# EAGLE board Gadget-Box-NodeMCU (EAGLE 6.6.0)
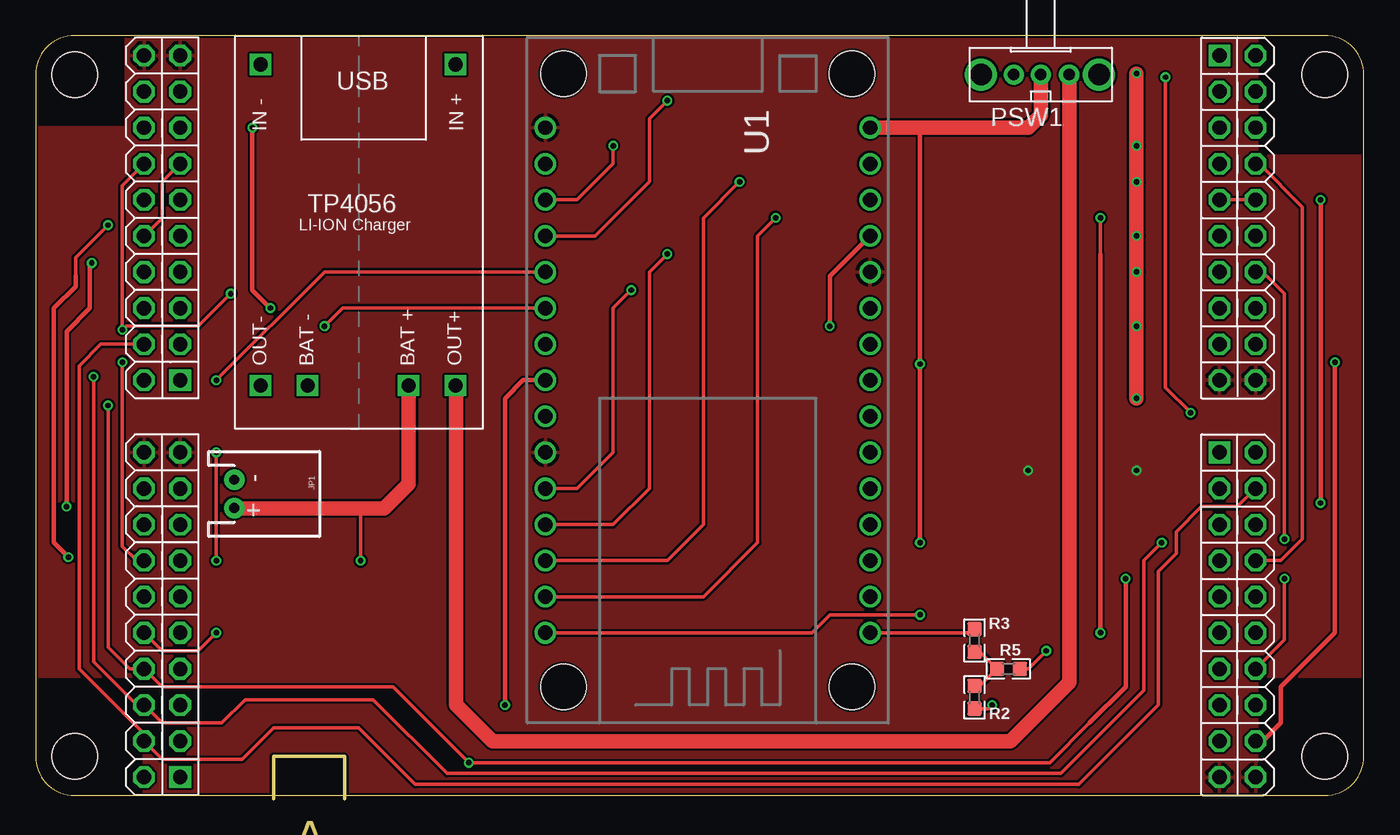
[diagram p0: board, top side]
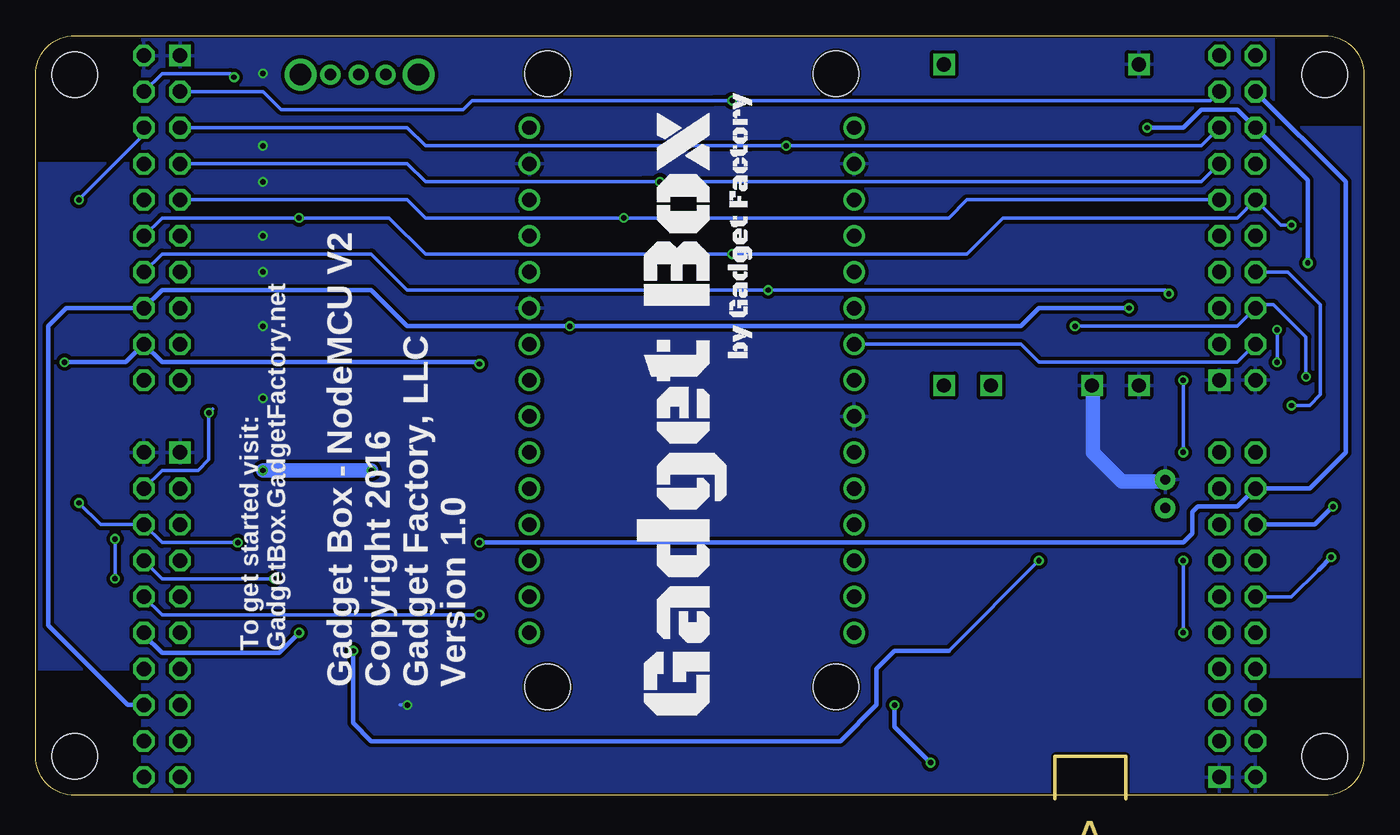
[diagram p1: board, bottom side, seen from below]

Size 93.5 x 53.75 mm. Coordinates in mm from the lower left corner, seen from the top.
Outline: 16.75,0 16.75,3 21.75,3 21.75,0
Copper layers (1*16): Top 0.035mm / dielectric 1.5mm / Bottom 0.035mm
Design rules "hackvana *": minimum track width 6mil, minimum drill 0.3mm, track to track 6mil, track to pad 6mil, pad to pad 6mil, via to via 6mil, smd to smd 0mil, copper to edge 6mil, drill to drill 6mil, minimum pad ring 10mil, minimum via ring 6mil, stop-mask expansion 2mil, vias tented up to drill 100mil, thermal gap 10mil
Net classes: 2 gnd: width 0.254 mm, drill 0.381 mm, clearance 0.254 mm; 3 usbvcc: width 0.254 mm, drill 0.381 mm, clearance 0.254 mm; 4 aref: width 0.254 mm, drill 0.381 mm, clearance 0.254 mm

## Footprints (pad centres in the part's own frame; a part is rotated, then mirrored left to right if it is on the bottom)
ECOG93P53P5 = hole 3.2: 4,4; 92,4; 92,52; 4,52
ECOG = drill 1.016 octagon: 3V3@B8 21.59,3.81; 3V3@G8 21.59,1.27; 5V@B7 19.05,3.81; G0 1.27,1.27; G1 3.81,1.27; G2 6.35,1.27; G3 8.89,1.27; G4 11.43,1.27; G5 13.97,1.27; G6 16.51,1.27; G7 19.05,1.27; GND@B -1.27,3.81; I2C-SCL@B5 13.97,3.81; I2C-SDA@B4 11.43,3.81; RESET@B6 16.51,3.81; SPI-CS@B3 8.89,3.81; SPI-MISO@B0 1.27,3.81; SPI-MOSI@B1 3.81,3.81; SPI-SCK@B2 6.35,3.81 | drill 1.016 square: GND@G -1.27,1.27
JST-2-PTH-NS = drill 0.7 pad 1.448: 1 -1,0; 2 1,0
OS102011MA1Q = drill 0.8 pad 1.422: 1 -2,0; 2 0,0; 3 1.9,0 | drill 1.5 pad 2.184: MT1 -4.1,0; MT2 4.2,0
0603 = smd 1 x 1: 1 -0.8,0; 2 0.8,0
ESP12E_DEVKIT = drill 1.016: 3V3@0 -11.43,-7.62; 3V3@1 11.43,5.08; 3V3@2 11.43,-17.78; AD0 -11.43,17.78; CLK -11.43,-2.54; CMD -11.43,2.54; D0 11.43,17.78; D1 11.43,15.24; D2 11.43,12.7; D3 11.43,10.16; D4 11.43,7.62; D5 11.43,0; D6 11.43,-2.54; D7 11.43,-5.08; D8 11.43,-7.62; EN -11.43,-10.16; GND@0 -11.43,-5.08; GND@1 -11.43,-15.24; GND@2 11.43,2.54; GND@3 11.43,-15.24; RST -11.43,-12.7; RSV@0 -11.43,15.24; RSV@1 -11.43,12.7; RX 11.43,-10.16; SD0 -11.43,0; SD1 -11.43,5.08; SD2 -11.43,7.62; SD3 -11.43,10.16; TX 11.43,-12.7; VIN -11.43,-17.78 | hole 3.2: -10.16,21.59; 10.16,21.59; 10.16,-21.59; -10.16,-21.59
TP4056 = drill 1 pad 1.422 square: BAT+ 3.505,-8.89; BAT- -3.607,-8.89; IN+ 6.807,13.716; IN- -6.909,13.716; OUT+ 6.807,-8.89; OUT- -6.909,-8.89

## Placement (x,y rotation side)
$$U$1  [ECOG93P53P5]  -1.25,-1 0 top
AH  ECOGECOG_SLOT  [ECOG]  82.06,23.13 270 top
AL  ECOGECOG_SLOT  [ECOG]  82.06,51.07 270 top
BH  ECOGECOG_SLOT  [ECOG]  11.45,30.75 90 top
BL  ECOGECOG_SLOT  [ECOG]  11.45,2.81 90 top
JP1  [JST-2-PTH-NS]  13.99,21.48 270 top
PSW1  OS102011MA1Q  [OS102011MA1Q]  70.75,51 180 top
R2  100k  [0603]  66.09,7.16 90 top
R3  DNP  [0603]  66.09,11.16 270 top
R5  100k  [0603]  68.47,9.16 0 top
U1  ESP12E_DEVKIT  [ESP12E_DEVKIT]  47.31,29.48 180 top
U$1  TP4056  [TP4056]  22.75,38 0 top
U$100  [GADGETBOX_TEXT]  47.79,27.18 90 bottom

## Library data of the parts
$$U$1 = eCogs
AH AL BH BL = eCogs; PARTNO: PPPC102LFBN-RC,SULLINS CONNECTOR SOLUTIONS,dk,S6106-ND,"CONN HEADER FEM 20POS.1"" DL GOLD", REF67
JP1 = SparkFun; PARTNO: B2B-PH-SM4-TB(LF)(SN),JST SALES AMERICA INC (VA),dk,455-1734-1-ND ,"2 Positions Header, Shrouded Connector 0.079 (2.00mm) Through Hole Tin ", REF87
PSW1 = adafruit; PARTNO: OS102011MA1QN1,C&K Components,dk,CKN9559-ND,SWITCH SLIDE SPDT 100MA 12V , REF72
R2 R5 = GadgetFactory; PARTNO: RC0603JR-07100KL,YAGEO (VA),dk,311-100KGRCT-ND,RES SMD 100K OHM 5% 1/10W 0603 , REF76
R3 = GadgetFactory; BOM: EXCLUDE
U1 = ESP12E_DEVKIT
U$1 = TP4056 charging module
U$100 = GadgetFactory

## Nets
3V3: AH.3V3@B8 AH.3V3@G8 AL.3V3@B8 AL.3V3@G8 BH.3V3@B8 BH.3V3@G8 BL.3V3@B8 BL.3V3@G8 U1.3V3@0 U1.3V3@1 U1.3V3@2
ADC: R3.1 U1.AD0
D0/RX/MISO: AL.G0 BH.G7 U1.RX
D1/TX/MOSI: AL.G1 BH.G6 U1.TX
D2: AL.G2 BH.G5 BH.SPI-CS@B3 U1.D2
D3: AL.G3 AL.SPI-CS@B3 BH.G4 U1.D1
GND [gnd]: AH.GND@B AH.GND@G AL.GND@B AL.GND@G BH.GND@B BH.GND@G BL.GND@B BL.GND@G JP1.1 R2.1 U1.GND@0 U1.GND@1 U1.GND@2 U1.GND@3 U$1.BAT- U$1.IN- U$1.OUT-
I2C-SCL: AH.I2C-SCL@B5 AL.I2C-SCL@B5 BH.I2C-SCL@B5 BL.I2C-SCL@B5 U1.D4
I2C-SDA/BOOTLOAD: AH.I2C-SDA@B4 AL.I2C-SDA@B4 BH.I2C-SDA@B4 BL.I2C-SDA@B4 U1.D3
N$2: R2.2 R3.2 R5.1
N$3: PSW1.1 U$1.OUT+
N$5: AL.G7
RESET: AH.RESET@B6 AL.RESET@B6 BH.RESET@B6 BL.RESET@B6 U1.EN
SPI-CSC: BL.SPI-CS@B3 U1.D8
SPI-CSD: AH.SPI-CS@B3 U1.D0
SPI-MISO: AH.SPI-MISO@B0 AL.SPI-MISO@B0 BH.SPI-MISO@B0 BL.SPI-MISO@B0 U1.D6
SPI-MOSI: AH.SPI-MOSI@B1 AL.SPI-MOSI@B1 BH.SPI-MOSI@B1 BL.SPI-MOSI@B1 U1.D7
SPI-SCK: AH.SPI-SCK@B2 AL.SPI-SCK@B2 BH.SPI-SCK@B2 BL.SPI-SCK@B2 U1.D5
VBAT: JP1.2 R5.2 U$1.BAT+
VIN: AH.5V@B7 AL.5V@B7 BH.5V@B7 BL.5V@B7 PSW1.2 U1.VIN

## Tracks (layer width: path | path; a pad name or v marks a point on that pad's centre or on a via)
3V3  (via drill 0.38)
  Bottom 1.016: v69.87,23.13 v77.49,23.13
  pour Top: -1.25,8.62 -1.25,47.28 6.37,47.28 6.37,54.88 85.95,54.88 85.95,45.26 94.92,45.26 94.92,8.62 85.95,8.62 85.95,-1 7.64,-1 7.64,8.62
ADC
  Top 0.254: U1.AD0 65.83,11.7 R3.1
D0/RX/MISO  (via drill 0.38)
  Top 0.254: U1.RX 39.39,39.64 43.2,43.45 43.2,47.9 v44.47,49.16
  Bottom 0.254: AL.G0 77.49,49.8 76.22,48.53 63.39,48.53 62.76,49.16 45.74,49.16 v44.47,49.16 10.81,49.16 BH.G7
D1/TX/MOSI  (via drill 0.38)
  Top 0.254: U1.TX 38.12,42.18 40.66,44.72 v40.66,45.99
  Bottom 0.254: AL.G1 67.33,47.26 66.06,45.99 43.2,45.99 v40.66,45.99 11.45,45.99 BH.G6
D2  (via drill 0.38)
  Top 0.254: BH.SPI-CS@B3 8.91,40.91 8.91,43.45 BH.G5 | U1.D2 44.47,16.78 47.01,19.32 47.01,40.91 v49.55,43.45
  Bottom 0.254: AL.G2 67.33,44.72 66.06,43.45 50.82,43.45 v49.55,43.45 11.45,43.45 BH.G5
D3  (via drill 0.38)
  Top 0.254: AL.G3 AL.SPI-CS@B3 | U1.D1 47.01,14.24 50.82,18.05 50.82,39.64 v52.09,40.91
  Bottom 0.254: AL.G3 67.33,42.18 66.06,40.91 54.63,40.91 v52.09,40.91 29.23,40.91 27.96,42.18 BH.G4
GND  (via drill 0.38)
  Top 0.254: R2.1 67.07,6.36 v67.33,6.62
  Top 1.016: v77.49,28.21 v77.49,33.29 v77.49,37.1 v77.49,39.64 v77.49,43.45 v77.49,45.99 v77.49,51.07
  Bottom 0.254: 67.84,6.62 v67.33,6.62
  Bottom 1.016: 13.99,22.37 17.04,22.37 19.07,24.4 19.07,29.04 U$1.BAT-
  pour Bottom: -1.25,8.65 -1.25,47.26 6.37,47.26 6.37,55.39 85.95,55.39 85.95,44.72 94.92,44.72 94.92,9.16 85.95,9.16 85.95,-1.51 7.64,-1.51 7.64,8.65
I2C-SCL  (via drill 0.38)
  Top 0.254: BL.I2C-SCL@B5 7.13,16.78 6.12,17.8 v6.12,30.75 | BH.I2C-SCL@B5 6.12,43.2 v6.12,33.04 6.37,33.29 11.45,33.29 12.72,34.56 v13.74,35.58 | AL.I2C-SCL@B5 86.38,37.1 87.9,35.58 v87.9,18.3 | v87.9,15.51 87.9,11.19 AH.I2C-SCL@B5 | U1.D4 38.12,21.86 40.66,24.4 40.66,34.56 v41.93,35.83
  Bottom 0.254: AL.I2C-SCL@B5 84.6,38.37 69.87,38.37 67.33,35.83 v41.93,35.83 13.99,35.83 v13.74,35.58 | v6.12,30.75 v6.12,33.04 | v87.9,18.3 v87.9,15.51
I2C-SDA/BOOTLOAD  (via drill 0.38)
  Top 0.254: 2.81,36.85 2.81,38.12 v5.1,40.4 | U1.D3 40.66,19.32 43.2,21.86 43.2,37.1 v44.47,38.37 | 74.95,38.37 v74.95,40.91
  Top 0.305: 2.81,36.85 2.81,36.08 1.29,34.56 1.29,18.05 v2.31,17.03 | v74.95,11.7 74.95,38.37
  Bottom 0.254: AL.I2C-SDA@B4 84.6,40.91 v74.95,40.91 73.68,40.91 68.6,40.91 66.06,38.37 v44.47,38.37 27.96,38.37 25.42,40.91 8.91,40.91 BH.I2C-SDA@B4 5.86,40.4 v5.1,40.4 | BL.I2C-SDA@B4 5.1,14.24 3.2,16.14
  Bottom 0.305: v2.31,17.03 3.2,16.14 | AH.I2C-SDA@B4 85.87,11.57 84.6,10.3 76.35,10.3 v74.95,11.7
N$2
  Top 0.254: R3.2 66.47,10.36 R5.1 66.47,7.96 R2.2
N$3
  Top 1.016: U$1.OUT+ 29.61,29.06 29.61,6.62 32.15,4.08 68.6,4.08 72.75,8.23 PSW1.1
RESET  (via drill 0.38)
  Top 0.305: v2.18,20.59 2.18,32.91 3.83,34.56 3.83,37.61 v3.96,37.73 | v55.9,33.29 55.9,36.8 U1.EN | v15.26,47.26 15.26,35.83 v16.53,34.56
  Bottom 0.305: BL.RESET@B6 3.45,19.32 v2.18,20.59 | v3.96,37.73 3.96,43.58 BH.RESET@B6 8.91,48.53 11.45,48.53 12.72,47.26 v15.26,47.26 | AH.RESET@B6 87.02,6.62 92.6,12.21 92.6,33.29 91.33,34.56 AL.RESET@B6 84.6,35.83 69.87,35.83 67.33,33.29 v55.9,33.29 24.15,33.29 22.88,34.56 v16.53,34.56
SPI-CSC  (via drill 0.38)
  Top 0.254: U1.D8 20.34,37.1 v12.72,29.48 | v12.72,11.7 11.45,10.43 8.91,10.43 BL.SPI-CS@B3 | v12.72,16.78 v12.72,24.4
  Bottom 0.254: v12.72,24.4 v12.72,29.48 | v12.72,11.7 v12.72,16.78
SPI-CSD  (via drill 0.38)
  Top 0.254: U1.D0 54.63,11.7 55.9,12.97 v62.25,12.97
  Bottom 0.254: v62.25,12.97 84.6,12.97 AH.SPI-CS@B3
SPI-MISO  (via drill 0.38)
  Top 0.254: AH.SPI-MISO@B0 84.6,20.59 82.06,20.59 80.28,18.81 80.28,17.29 79.01,16.02 79.01,6.62 73.43,1.03 26.72,1.03 22.75,5 16.75,5 14.56,2.81 8.91,2.81 BL.SPI-MISO@B0 7.64,4.59 3.07,9.16 3.07,30.5 4.59,32.02 BH.SPI-MISO@B0 | v79.52,50.82 79.52,28.97 v81.3,27.19
  Bottom 0.254: AL.SPI-MISO@B0 84.6,51.07 79.78,51.07 v79.52,50.82 | AH.SPI-MISO@B0 84.6,23.13 82.06,23.13 81.3,23.89 v81.3,27.19 81.05,27.45 | U1.D6 24.15,32.02 22.88,30.75 8.91,30.75 BH.SPI-MISO@B0
SPI-MOSI  (via drill 0.38)
  Top 0.254: v79.27,18.05 78,16.78 78,7.64 72.16,1.79 28.96,1.79 23.75,7 14.75,7 13.1,5.35 8.91,5.35 BL.SPI-MOSI@B1 7.13,6.62 4.08,9.67 v4.08,29.73 | U1.D7 21.61,34.56 v20.34,33.29
  Top 0.305: v90.44,42.18 v90.44,20.84
  Bottom 0.254: v79.27,18.05 84.6,18.05 AH.SPI-MOSI@B1 88.92,19.32 v90.44,20.84 | v4.08,29.73 4.08,32.53 6.37,34.81 7.39,34.81 BH.SPI-MOSI@B1 8.91,33.29 v20.34,33.29 | AL.SPI-MOSI@B1 85.87,46.75 v90.44,42.18
SPI-SCK  (via drill 0.38)
  Top 0.254: 74.19,5.35 71.39,2.56 v30.5,2.56 25.17,7.89 8.91,7.89 BL.SPI-SCK@B2 6.62,9.16 5.1,10.68 v5.1,27.7 | AL.SPI-SCK@B2 86.13,44.72 89.17,41.67 89.17,18.3 87.65,16.78 AH.SPI-SCK@B2
  Top 0.305: U1.D5 34.31,29.48 33.04,28.21 v33.04,6.62 | 74.19,5.35 76.73,7.89 v76.73,15.51
  Bottom 0.254: v76.73,15.51 84.6,15.51 AH.SPI-SCK@B2 | v5.1,27.7 3.83,27.7 3.07,28.46 3.07,34.81 5.35,37.1 BH.SPI-SCK@B2
  Bottom 0.305: v33.04,6.62 33.04,5.1 v30.5,2.56
VBAT  (via drill 0.38)
  Top 0.254: R5.2 69.87,9.16 v71.14,10.43 | v22.88,16.78 22.88,20.46
  Top 1.016: U$1.BAT+ 26.25,22.19 24.53,20.46 22.88,20.46 14.01,20.46 JP1.2
  Bottom 0.254: 29.23,10.43 v22.88,16.78
  Bottom 0.305: v71.14,10.43 71.14,5.35 69.87,4.08 36.85,4.08 34.31,6.62 34.31,9.16 33.04,10.43 29.23,10.43
VIN  (via drill 0.38)
  Top 0.305: AH.5V@B7 86.38,4.08 87.65,5.35 87.65,7.89 91.46,11.7 v91.46,30.75 | 62.12,47.26 62.25,47.13 v62.25,30.62 v62.25,18.05
  Top 1.016: PSW1.2 70.75,48.14 69.87,47.26 62.12,47.26 U1.VIN
  Bottom 0.305: BH.5V@B7 1.29,43.45 1.29,24.4 3.83,21.86 BL.5V@B7 8.91,20.59 11.7,20.59 12.09,20.21 12.09,18.68 12.72,18.05 v62.25,18.05 | v91.46,30.75 87.14,30.75 AL.5V@B7 84.6,30.75 62.38,30.75 v62.25,30.62

## Text on the board
Dimension: Cutout->
bPlace: To get started visit: / GadgetBox.GadgetFactory.net | Gadget Box - NodeMCU V2 / Copyright 2016 / Gadget Factory, LLC / Version 1.0
Reference: TOP Silkscreen is on layer 200